# EAGLE board main (tugas nanang) (EAGLE 9.6.2)
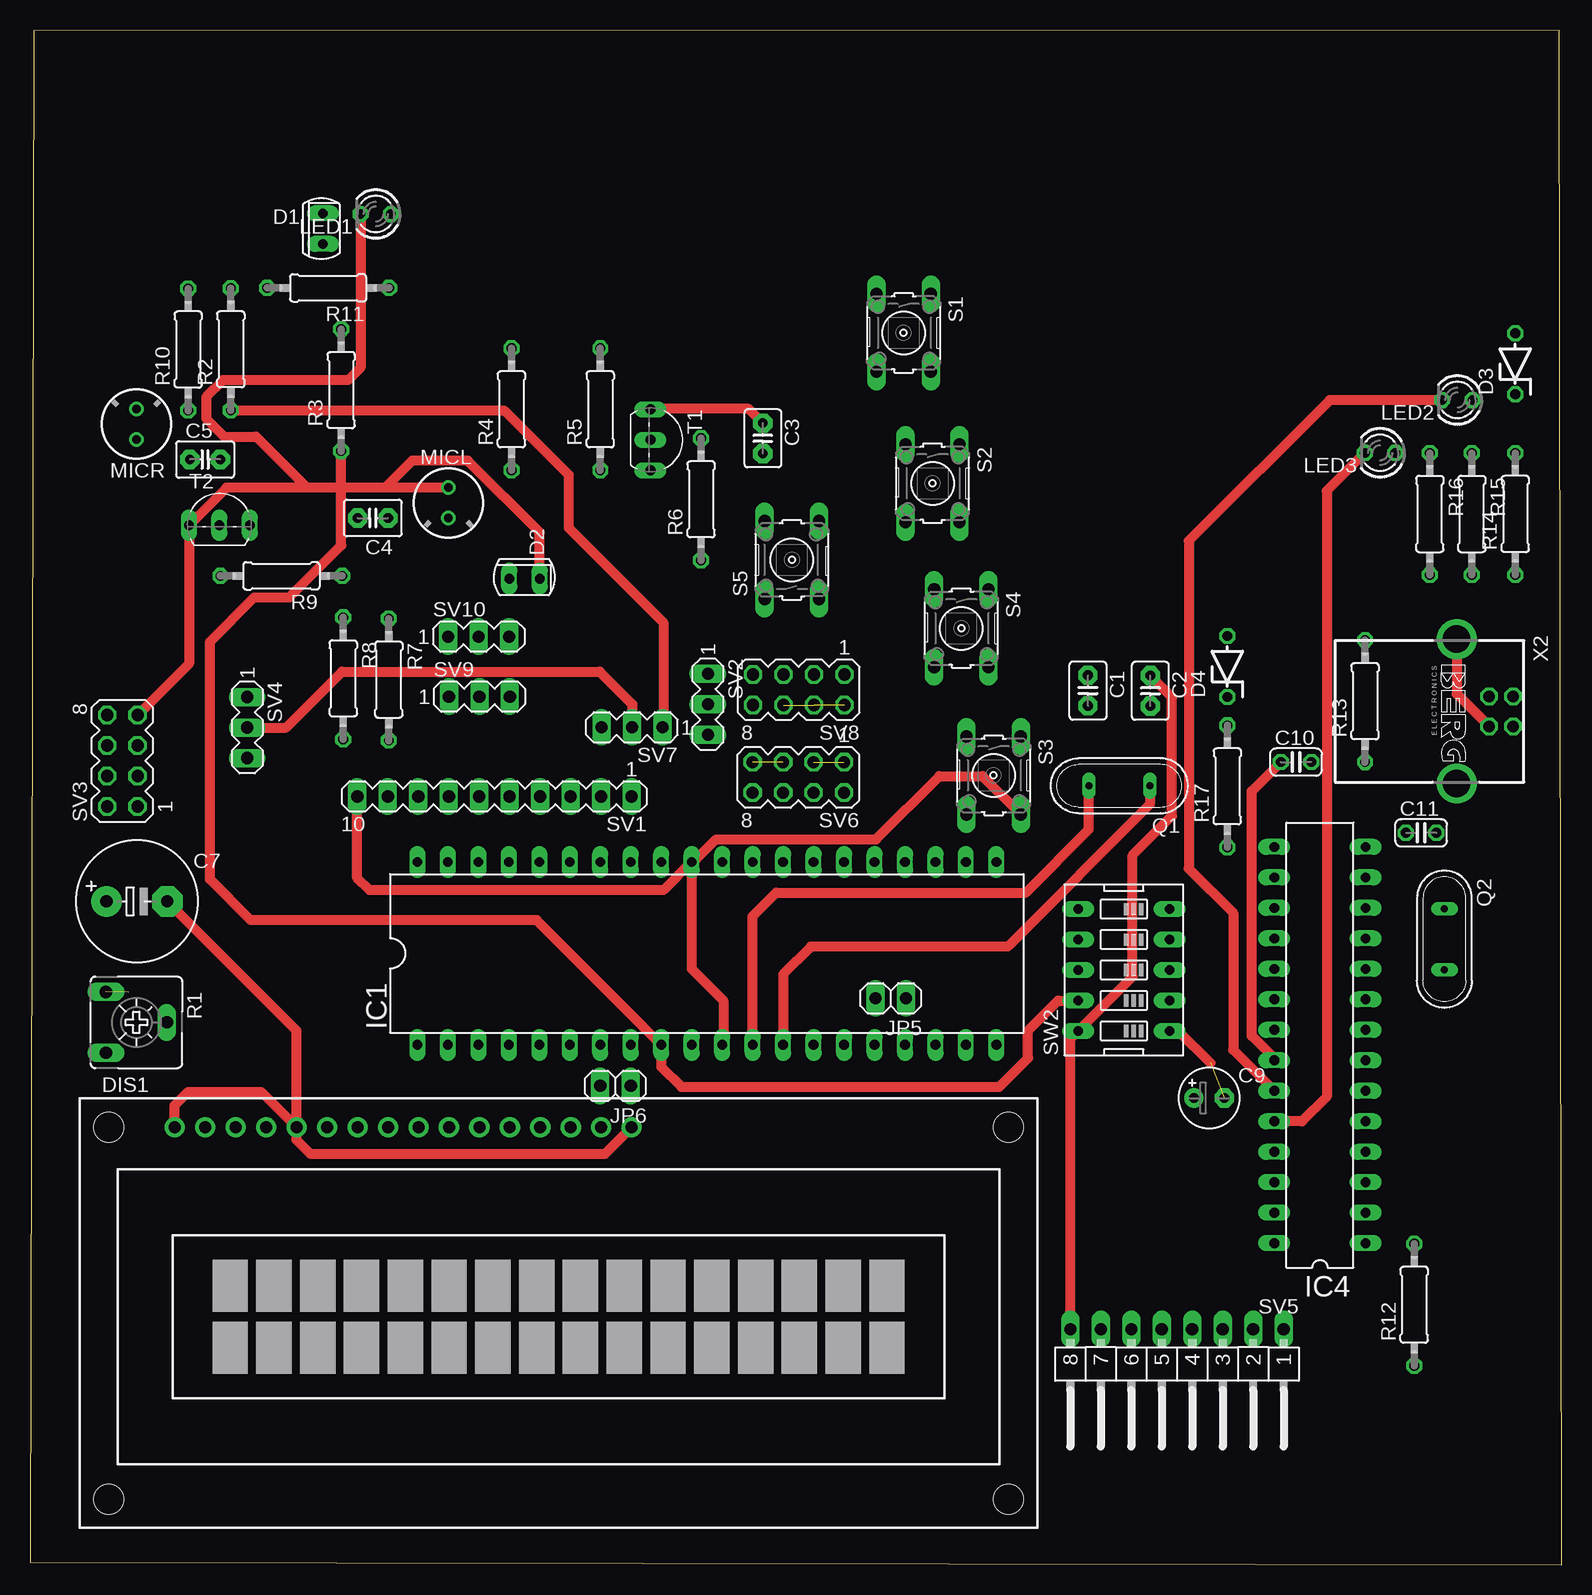
[diagram p0: board, top side]
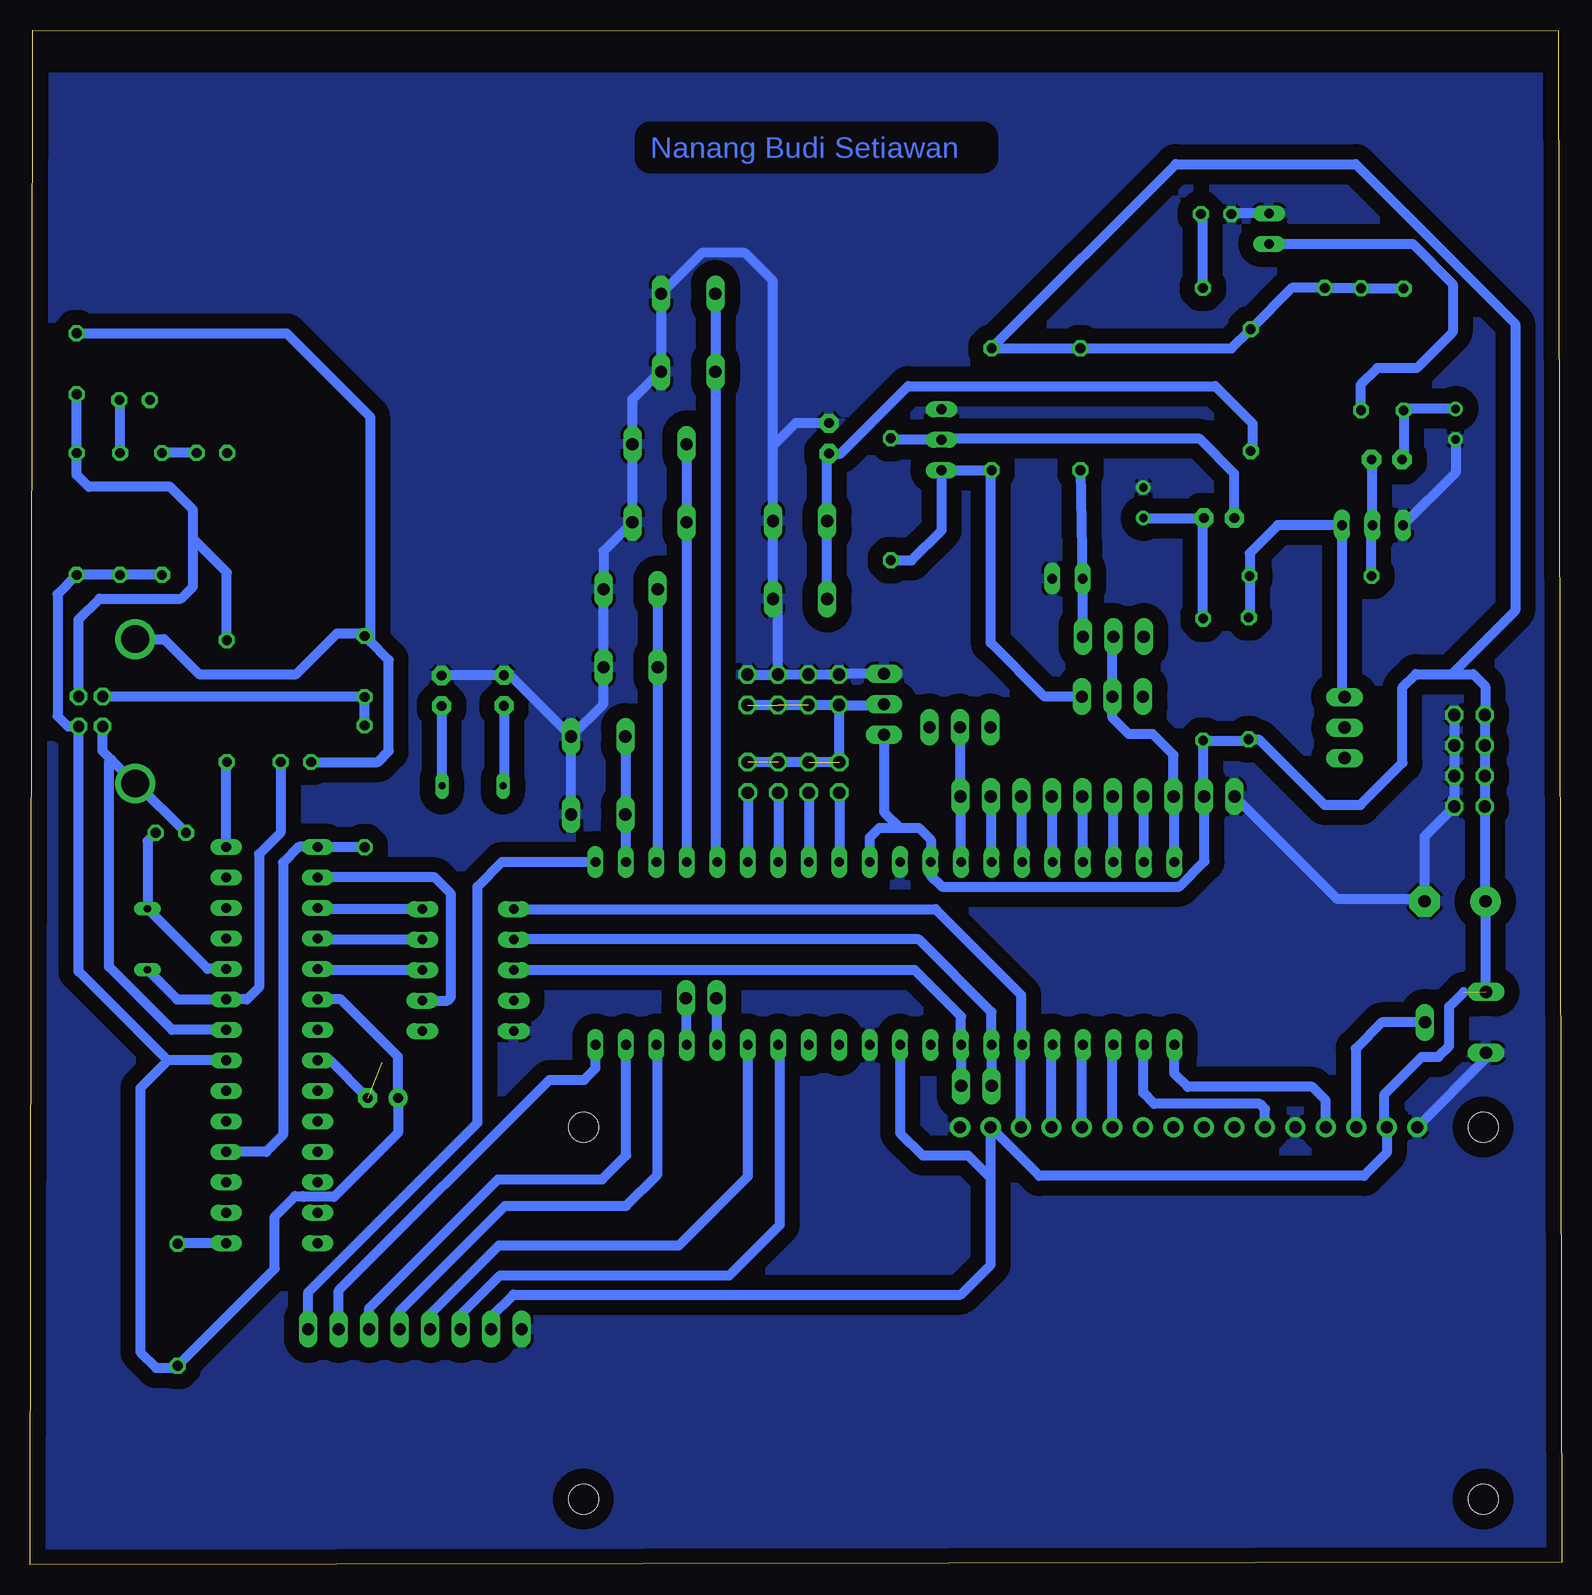
[diagram p1: board, bottom side, seen from below]

Size 127.7 x 127.88 mm. Coordinates in mm from the lower left corner, seen from the top.
Outline: 0,0.2 127.7,0 127.47,127.88 0.3,127.8 0,0.2
Copper layers (1*16): Top 0.035mm / dielectric 1.5mm / Bottom 0.035mm
Design rules "default": minimum track width 6mil, minimum drill 0.35mm, track to track 6mil, track to pad 6mil, pad to pad 6mil, via to via 6mil, smd to smd 6mil, copper to edge 40mil, drill to drill 6mil, minimum pad ring 10mil, minimum via ring 8mil, stop-mask expansion 4mil, vias tented up to drill 0mil, thermal gap 10mil

## Footprints (pad centres in the part's own frame; a part is rotated, then mirrored left to right if it is on the bottom)
C2.5-3 = drill 0.813 pad 1.6 octagon: 1 -1.27,0; 2 1.27,0
E5-10,5 = drill 1.016 pad 2.54: + -2.54,0 | drill 1.016 pad 2.54 octagon: - 2.54,0
E2,5-5 = drill 0.813 pad 1.6: + -1.27,0 | drill 0.813 pad 1.6 octagon: - 1.27,0
C025-024X044 = drill 0.813 octagon: 1 -1.27,0; 2 1.27,0
SFH225 = drill 0.813 long: A 0,1.27; K 0,-1.27
ZDIO-5 = drill 0.813 octagon: A 2.54,0; C -2.54,0
TUXGR_16X2_R2 = drill 1 pad 1.676: 1 -32,15.5; 2 -29.46,15.5; 3 -26.92,15.5; 4 -24.38,15.5; 5 -21.84,15.5; 6 -19.3,15.5; 7 -16.76,15.5; 8 -14.22,15.5; 9 -11.68,15.5; 10 -9.14,15.5; 11 -6.6,15.5; 12 -4.06,15.5; 13 -1.52,15.5; 14 1.02,15.5; 15 3.56,15.5; 16 6.1,15.5 | hole 2.5: -37.5,-15.5; 37.5,-15.5; -37.5,15.5; 37.5,15.5
DIL40 = drill 0.813 long: 1 -24.13,-7.62; 2 -21.59,-7.62; 3 -19.05,-7.62; 4 -16.51,-7.62; 5 -13.97,-7.62; 6 -11.43,-7.62; 7 -8.89,-7.62; 8 -6.35,-7.62; 9 -3.81,-7.62; 10 -1.27,-7.62; 11 1.27,-7.62; 12 3.81,-7.62; 13 6.35,-7.62; 14 8.89,-7.62; 15 11.43,-7.62; 16 13.97,-7.62; 17 16.51,-7.62; 18 19.05,-7.62; 19 21.59,-7.62; 20 24.13,-7.62; 21 24.13,7.62; 22 21.59,7.62; 23 19.05,7.62; 24 16.51,7.62; 25 13.97,7.62; 26 11.43,7.62; 27 8.89,7.62; 28 6.35,7.62; 29 3.81,7.62; 30 1.27,7.62; 31 -1.27,7.62; 32 -3.81,7.62; 33 -6.35,7.62; 34 -8.89,7.62; 35 -11.43,7.62; 36 -13.97,7.62; 37 -16.51,7.62; 38 -19.05,7.62; 39 -21.59,7.62; 40 -24.13,7.62
DIL28-3 = drill 0.813 long: 1 -16.51,-3.81; 2 -13.97,-3.81; 3 -11.43,-3.81; 4 -8.89,-3.81; 5 -6.35,-3.81; 6 -3.81,-3.81; 7 -1.27,-3.81; 8 1.27,-3.81; 9 3.81,-3.81; 10 6.35,-3.81; 11 8.89,-3.81; 12 11.43,-3.81; 13 13.97,-3.81; 14 16.51,-3.81; 15 16.51,3.81; 16 13.97,3.81; 17 11.43,3.81; 18 8.89,3.81; 19 6.35,3.81; 20 3.81,3.81; 21 1.27,3.81; 22 -1.27,3.81; 23 -3.81,3.81; 24 -6.35,3.81; 25 -8.89,3.81; 26 -11.43,3.81; 27 -13.97,3.81; 28 -16.51,3.81
1X02 = drill 1.016 long: 1 -1.27,0; 2 1.27,0
LED3MM = drill 0.813 octagon: A -1.27,0; K 1.27,0
F6050AP = drill 0.7 pad 1.2: 1 0,1.27; 2 0,-1.27
QS = drill 0.61 long: 1 -2.54,0; 2 2.54,0
CA6V = drill 1.016 long: A -2.54,-2.54; E 2.54,-2.54; S 0,2.54
0207/10 = drill 0.813 octagon: 1 -5.08,0; 2 5.08,0
B3F-10XX = drill 1.016 long: 1 -3.251,2.261; 2 3.251,2.261; 3 -3.251,-2.261; 4 3.251,-2.261
MA10-1 = drill 1.016 long: 1 -11.43,0; 2 -8.89,0; 3 -6.35,0; 4 -3.81,0; 5 -1.27,0; 6 1.27,0; 7 3.81,0; 8 6.35,0; 9 8.89,0; 10 11.43,0
MA03-1 = drill 1.016 long: 1 -2.54,0; 2 0,0; 3 2.54,0
MA04-2 = drill 1.016 octagon: 1 -3.81,-1.27; 2 -3.81,1.27; 3 -1.27,-1.27; 4 -1.27,1.27; 5 1.27,-1.27; 6 1.27,1.27; 7 3.81,-1.27; 8 3.81,1.27
MA08-1W = drill 1.016 long: 1 -8.89,0; 2 -6.35,0; 3 -3.81,0; 4 -1.27,0; 5 1.27,0; 6 3.81,0; 7 6.35,0; 8 8.89,0
EDG-05 = drill 0.813 long: 1 -5.08,-3.81; 2 -2.54,-3.81; 3 0,-3.81; 4 2.54,-3.81; 5 5.08,-3.81; 6 5.08,3.81; 7 2.54,3.81; 8 0,3.81; 9 -2.54,3.81; 10 -5.08,3.81
TO92-EBC = drill 0.813 long: B 0,-1.27; C 2.54,-1.27; E -2.54,-1.27
PN61729-S = drill 0.95 octagon: 1 1.25,4.71; 2 -1.25,4.71; 3 -1.25,2.71; 4 1.25,2.71 | drill 2.3 pad 2.9: S1 -6.02,0; S2 6.02,0

## Placement (x,y rotation side)
C1  22p  [C2.5-3]  88.19,72.83 270 top
C2  22p  [C2.5-3]  93.39,72.81 270 top
C3  10nF  [C2.5-3]  61.09,93.85 270 top
C4  100nF  [C2.5-3]  28.58,87.21 180 top
C5  100nF  [C2.5-3]  14.6,92.09 0 top
C7  1000uF/16V  [E5-10,5]  8.91,55.27 0 top
C9  10uF/16V  [E2,5-5]  98.29,38.88 0 top
C10  22pF  [C025-024X044]  105.54,66.88 0 top
C11  22pF  [C025-024X044]  115.96,60.98 0 top
D1  SFH225  [SFH225]  24.41,111.32 180 top
D2  SFH225  [SFH225]  41.22,82.16 90 top
D3  DZ3,6V  [ZDIO-5]  123.81,100.06 90 top
D4  DZ3,6V  [ZDIO-5]  99.81,74.84 90 top
DIS1  TUXGR_16X2_R2  [TUXGR_16X2_R2]  44.06,20.95 0 top
IC1  MEGA16-P  [DIL40]  56.43,50.93 0 top
IC4  MEGA8-P  [DIL28-3]  107.53,43.29 90 top
JP5  [1X02]  71.76,47.19 180 top
JP6  [1X02]  48.81,39.89 180 top
LED1  merah  [LED3MM]  28.82,112.54 180 top
LED2  Merah  [LED3MM]  118.98,97.04 180 top
LED3  hijau  [LED3MM]  112.54,92.64 180 top
MICL  MC  [F6050AP]  34.89,88.47 0 top
MICR  MC  [F6050AP]  8.86,95.03 180 top
Q1  8MHz  [QS]  90.81,64.9 180 top
Q2  12MHz  [QS]  117.9,52.11 270 top
R1  20K  [CA6V]  8.87,45.18 270 top
R2  56K  [0207/10]  16.74,101.27 90 top
R3  10K  [0207/10]  25.94,97.87 90 top
R4  56K  [0207/10]  40.14,96.27 90 top
R5  10K  [0207/10]  47.54,96.27 90 top
R6  100K  [0207/10]  55.94,88.77 90 top
R7  10K  [0207/10]  29.91,73.75 270 top
R8  10K  [0207/10]  26.11,73.85 270 top
R9  100K  [0207/10]  20.95,82.39 180 top
R10  10K  [0207/10]  13.19,101.25 90 top
R11  330  [0207/10]  24.85,106.39 180 top
R12  10K  [0207/10]  115.39,21.65 90 top
R13  68  [0207/10]  111.29,71.95 90 top
R14  2K2  [0207/10]  123.81,87.55 90 top
R15  330  [0207/10]  120.19,87.55 270 top
R16  330  [0207/10]  116.69,87.55 270 top
R17  68  [0207/10]  99.81,64.85 90 top
S1  [B3F-10XX]  72.83,102.64 270 top
S2  [B3F-10XX]  75.23,90.1 270 top
S3  [B3F-10XX]  80.33,65.76 270 top
S4  [B3F-10XX]  77.63,78.02 270 top
S5  [B3F-10XX]  63.51,83.72 90 top
SV1  [MA10-1]  38.72,64.01 180 top
SV2  [MA03-1]  56.51,71.69 270 top
SV3  [MA04-2]  7.7,66.98 90 top
SV4  [MA03-1]  18.11,69.75 270 top
SV5  [MA08-1W]  95.61,19.62 180 top
SV6  [MA04-2]  64.05,65.6 180 top
SV7  [MA03-1]  50.18,69.77 180 top
SV8  [MA04-2]  64.08,72.9 180 top
SV9  [MA03-1]  37.46,72.33 0 top
SV10  [MA03-1]  37.4,77.33 0 top
SW2  [EDG-05]  91.18,49.54 90 top
T1  [TO92-EBC]  52.99,93.73 270 top
T2  [TO92-EBC]  15.79,87.88 0 top
X2  PN61729-S  [PN61729-S]  118.93,71.1 270 top

## Library data of the parts
C1-C5 = capacitor-wima
C7 C9-C11 R2-R11 = rcl
D1 D2 = opto-trans-siemens; OC_FARNELL: unknown; OC_NEWARK: unknown
D3 D4 = diode
DIS1 = display-lcd; OC_FARNELL: unknown; OC_NEWARK: unknown
IC1 = atmel; MPN: ATMEGA16-16PU; OC_FARNELL: 9171142; OC_NEWARK: 01M6885
IC4 = atmel
JP5 JP6 = pinhead
LED1-LED3 = led
MICL MICR = microphon
Q1 Q2 SW2 = special
R1 = pot
R12-R17 = resistor
S1-S5 = switch-omron; MPN: B3F-1000; OC_FARNELL: 176432; OC_NEWARK: 36M3542
SV1-SV10 = con-lstb; OC_FARNELL: unknown; OC_NEWARK: unknown
T1 T2 = transistor
X2 = con-berg

## Nets
DGND: C9.- C10.1 C11.1 D3.A D4.A IC4.8 IC4.22 SW2.1 X2.4 X2.S1 X2.S2
GND: C1.1 C2.1 C3.1 C7.- D1.K D2.K DIS1.1 DIS1.5 DIS1.16 IC1.11 IC1.31 LED1.K MICL.1 MICR.1 R1.E S1.1 S1.2 S2.1 S2.2 S3.1 S3.2 S4.1 S4.2 S5.3 S5.4 SV1.10 SV2.1 SV3.1 SV3.3 SV3.5 SV3.7 SV5.8 SV8.1 SV8.3 SV8.5 SV8.7 SW2.10 T1.E T2.E
MISO: IC1.7 JP6.2 SW2.7
MOSI: DIS1.14 IC1.6 SW2.6
N$1: IC1.33 SV1.1 SV4.2 SV7.2
N$2: IC1.34 SV1.2
N$3: IC1.35 SV1.3
N$4: IC1.36 SV1.4
N$5: IC1.37 SV1.5
N$6: IC1.38 SV1.6
N$7: IC1.39 SV1.7
N$8: D2.A R4.1 SV10.3
N$9: IC1.24 S2.3 S2.4
N$10: DIS1.13 IC1.5
N$11: DIS1.12 IC1.4
N$12: DIS1.11 IC1.3
N$13: DIS1.6 IC1.2
N$14: R5.1 R6.1 SV9.3 T1.C
N$15: DIS1.3 R1.S
N$16: C1.2 IC1.12 Q1.2
N$17: C2.2 IC1.13 Q1.1
N$18: DIS1.4 IC1.1
N$19: D1.A R2.1 SV7.1
N$20: IC1.23 S4.3 S4.4
N$21: IC1.40 SV1.8 SV9.2 SV10.2
N$22: C4.2 R6.2 T1.B
N$23: C4.1 MICL.2 R7.1
N$24: R8.1 R9.1 SV4.1 T2.C
N$25: C5.2 R9.2 T2.B
N$26: C5.1 MICR.2 R10.1
N$27: IC1.22 S3.3 S3.4
N$28: IC1.25 S1.3 S1.4
N$30: IC1.21 SV5.1
N$32: IC1.20 SV5.2
N$33: IC1.19 SV5.3
N$34: IC1.18 SV5.4
N$35: IC1.15 SV5.5
N$36: IC1.14 SV5.6
N$37: IC1.16 JP5.2
N$38: IC1.17 JP5.1
N$41: LED1.A R11.1
N$42: IC4.1 R12.2
N$44: IC1.26 SV6.2
N$45: IC1.27 SV6.4
N$46: IC1.28 SV6.6
N$47: IC1.29 SV6.8
N$51: C10.2 IC4.9 Q2.2
N$52: C11.2 IC4.10 Q2.1
N$53: IC4.14 R13.1
N$55: LED2.A R15.1
N$56: LED3.A R16.1
N$57: IC4.23 LED2.K
N$58: IC4.24 LED3.K
N$59: D4.C R17.2 X2.3
N$67: IC4.4 IC4.15 R17.1
N$69: D3.C R13.2 R14.2 X2.2
N$175: IC4.17 SW2.5
N$176: IC4.18 SW2.4
N$177: IC4.19 SW2.3
N$178: IC4.16 SW2.2
RESET: C3.2 IC1.9 R3.1 S5.1 S5.2 SW2.9
SCK: IC1.8 JP6.1 SW2.8
VCC: C7.+ DIS1.2 DIS1.15 IC1.10 IC1.30 IC1.32 R1.A R2.2 R3.2 R4.2 R5.2 R7.2 R8.2 R10.2 R11.2 SV1.9 SV2.3 SV3.2 SV3.4 SV3.6 SV3.8 SV5.7
VDD: SV2.2 SV6.1 SV6.3 SV6.5 SV6.7 SV8.2 SV8.4 SV8.6 SV8.8
VPP: C9.+ IC4.7 IC4.20 R12.1 R14.1 R15.2 R16.2 X2.1

## Tracks (layer width: path | path; a pad name or v marks a point on that pad's centre or on a via)
DGND  (1 unrouted)
  Top 0.813: IC4.22 103.72,42.17 101.84,44.05 101.84,64.45 C10.1 | SW2.1 95.74,44.46 98.4,41.8 | X2.S1 118.93,72.56 X2.4
  Bottom 0.813: 120.92,67.08 X2.S2 118.79,65.08 C11.1 | 120.92,67.08 121.64,67.79 X2.4 | X2.S1 116.52,77.12 113.6,74.2 105.5,74.2 102.1,77.6 100.03,77.6 D4.A 99.36,76.94 | C10.1 98.72,66.88 97.8,67.8 97.8,75.37 99.36,76.94 | IC4.8 115.86,44.56 121.1,49.8 121.1,66.9 120.92,67.08 | C9.- 102.7,42.02 IC4.22 | D3.A 106.3,102.6 99.36,95.67 99.36,76.94
GND
  Top 0.813: SV3.7 13.25,75.07 T2.E 16.38,89.74 23.1,89.74 | MICL.1 29.6,89.74 | 29.6,89.74 23.1,89.74 | D2.K 42.49,86.01 36.5,92 31.86,92 29.6,89.74 | LED1.K 27.55,99.75 26.5,98.7 16.1,98.7 14.7,97.3 14.7,95.5 16.2,94 18.84,94 23.1,89.74 | IC1.31 55.16,49.64 57.8,47 57.8,43.41 IC1.11 | SV5.8 86.72,43.81 SW2.10 91.9,48.99 91.9,59.1 95.2,62.4 95.2,72.27 C2.1 | C3.1 59.91,96.3 51.75,96.3 T1.E | IC1.31 52.81,56.2 28.3,56.2 27.29,57.21 SV1.10 | IC1.31 55.31,58.55 57.2,60.43 70.53,60.43 75.8,65.7 79.4,65.7 S3.2 | DIS1.5 22.22,44.5 C7.- | DIS1.1 12.06,38.26 13.2,39.4 19.27,39.4 DIS1.5 | DIS1.16 47.91,34.2 23.4,34.2 22.22,35.38 DIS1.5
  Bottom 0.813: SV8.3 SV8.5 SV8.7 60.21,74.23 SV2.1 | SV8.1 SV8.3 | S5.4 S5.3 65.35,80.05 SV8.3 | C3.1 63.88,95.12 65.8,93.2 65.8,87 S5.4 | 75.1,99.5 S1.1 71.68,109.3 68.1,109.3 65.77,106.97 S5.4 | 75.1,99.5 75.1,98.8 75.09,98.81 S1.2 | S3.1 79.89,71.71 S4.2 S4.1 79.89,84.45 S2.2 S2.1 77.49,97.11 75.1,99.5 | MICR.1 8.86,91 T2.E | C7.- 11.45,55.5 | 11.45,55.5 11.45,60.69 SV3.1 9.1,63.3 9.1,63.8 8.97,63.93 SV3.3 SV3.5 SV3.7 | SV1.10 18.78,55.5 11.45,55.5 | C2.1 93.37,74.1 C1.1 87.68,74.1 S3.1 | D1.K 27.5,112.59 LED1.K | S3.2 S3.1 | R1.E 6.33,42.18 DIS1.1
  pour Bottom (isolate 1.27): 0.3,123.9 126.3,123.9 126.3,-0.1 0.3,-0.1 0.3,121.9
MISO
  Bottom 0.813: SW2.7 87.35,52.1 53.6,52.1 47.54,46.04 IC1.7 JP6.2 | JP6.2 47.54,39.44 47.5,39.4 47.5,39.85 JP6.2
MOSI
  Bottom 0.813: DIS1.14 45.08,42.8 45.08,43.23 | 45.08,43.23 IC1.6 | SW2.6 52.22,54.62 45.08,47.48 45.08,43.23
N$1
  Top 0.813: SV4.2 21.35,69.75 26.01,74.41 47.49,74.41 50.2,71.7 50.2,69.79 SV7.2
  Bottom 0.813: IC1.33 50.08,63.94 SV1.1 50.15,69.74 SV7.2
N$2
  Bottom 0.813: IC1.34 47.54,63.94 SV1.2
N$3
  Bottom 0.813: IC1.35 45,63.94 SV1.3
N$4
  Bottom 0.813: IC1.36 42.46,63.94 SV1.4
N$5
  Bottom 0.813: IC1.37 39.92,63.94 SV1.5
N$6
  Bottom 0.813: IC1.38 37.38,63.94 SV1.6
N$7
  Bottom 0.813: IC1.39 34.84,63.94 SV1.7
N$8
  Bottom 0.813: SV10.3 D2.A 39.99,82.2 R4.1
N$9
  Bottom 0.813: S2.3 S2.4 72.97,58.58 IC1.24
N$10
  Bottom 0.813: DIS1.13 42.54,43.23 IC1.5
N$11
  Bottom 0.813: DIS1.12 40,43.23 IC1.4
N$12
  Bottom 0.813: DIS1.11 37.46,43.23 IC1.3
N$13
  Bottom 0.813: DIS1.6 24.76,37.96 25.2,38.4 34,38.4 34.9,39.3 34.9,43.25 IC1.2
N$14
  Bottom 0.813: SV9.3 43.13,72.33 47.6,76.8 47.6,91.13 | 47.6,91.13 R5.1 | 47.6,91.13 47.66,91.19 T1.C 51.7,91.17 51.7,86.2 54.21,83.69 R6.1
N$15
  Bottom 0.813: R1.S 15.02,45.18 17.2,43 17.2,36.51 DIS1.3
N$16
  Top 0.813: Q1.2 88.27,61.27 83,56 62.2,56 60.24,54.04 IC1.12
  Bottom 0.813: C1.2 88.19,64.98 Q1.2
N$17
  Top 0.813: Q1.1 93.35,63.35 81.5,51.5 65.1,51.5 62.78,49.18 IC1.13
  Bottom 0.813: Q1.1 93.35,71.5 C2.2
N$18
  Bottom 0.813: DIS1.4 19.68,38.68 20.8,39.8 31.2,39.8 32.3,40.9 IC1.1
N$19
  Top 0.813: R2.1 39.51,96.19 44.9,90.8 44.9,86.4 52.8,78.5 52.8,69.85 SV7.1
  Bottom 0.813: D1.A 12.45,110.05 9.1,106.7 9.1,102.7 12.1,99.7 15.4,99.7 16.8,98.3 16.8,96.25 R2.1
N$20
  Bottom 0.813: S4.3 S4.4 75.37,58.66 IC1.23
N$21
  Bottom 0.813: IC1.40 32.3,63.94 SV1.8 32.37,67.47 34.1,69.2 36.1,69.2 37.46,70.56 SV9.2 37.46,77.27 SV10.2
N$22
  Bottom 0.813: R6.2 55.82,93.73 T1.B 51.65,93.8 30.2,93.8 27.31,90.91 C4.2
N$23
  Bottom 0.813: R7.1 29.91,87.15 | 29.91,87.15 C4.1 | MICL.2 29.96,87.2 29.91,87.15
N$24
  Bottom 0.813: R8.1 26.03,79.01 R9.1 26.03,84.27 23.69,86.61 T2.C 18.33,72.51 SV4.1
N$25
  Bottom 0.813: R9.2 15.87,86.53 T2.B 15.79,92.01 C5.2
N$26
  Bottom 0.813: C5.1 13.19,92.23 R10.1 13.06,96.3 MICR.2
N$27
  Bottom 0.813: IC1.22 78.02,62.46 S3.4 S3.3
N$28
  Bottom 0.813: S1.3 S1.4 70.57,58.72 IC1.25
N$30
  Bottom 0.813: SV5.1 104.5,22.7 90.4,36.8 90.4,56.5 88.35,58.55 IC1.21
N$32
  Bottom 0.813: SV5.2 101.96,22.84 84.4,40.4 81.5,40.4 80.56,41.34 IC1.20
N$33
  Bottom 0.813: SV5.3 99.42,21.38 88.7,32.1 80,32.1 78,34.1 78,43.29 IC1.19
N$34
  Bottom 0.813: SV5.4 96.88,21.12 88.1,29.9 78,29.9 75.4,32.5 75.4,43.23 IC1.18
N$35
  Bottom 0.813: SV5.5 94.34,20.86 88.6,26.6 73.6,26.6 67.86,32.34 IC1.15
N$36
  Bottom 0.813: SV5.6 91.8,20.8 88.5,24.1 69.4,24.1 65.2,28.3 65.2,43.19 IC1.14
N$37
  Bottom 0.813: JP5.2 70.49,43.4 IC1.16
N$38
  Bottom 0.813: JP5.1 73.03,43.4 IC1.17
N$41
  Bottom 0.813: R11.1 29.93,112.38 LED1.A
N$42
  Bottom 0.813: IC4.1 115.34,26.78 R12.2
N$44
  Bottom 0.813: SV6.2 IC1.26
N$45
  Bottom 0.813: SV6.4 IC1.27
N$46
  Bottom 0.813: SV6.6 IC1.28
N$47
  Bottom 0.813: SV6.8 IC1.29
N$51
  Bottom 0.813: Q2.2 115.43,47.1 IC4.9 109.6,47.1 108.6,48.1 108.6,59.2 106.81,60.99 C10.2
N$52
  Bottom 0.813: IC4.10 112.89,49.64 Q2.1 117.9,60.31 C11.2
N$53
  Bottom 0.813: IC4.14 111.34,66.82 R13.1
N$55
  Bottom 0.813: R15.1 120.19,96.98 LED2.A
N$56
  Bottom 0.813: LED3.A R16.1
N$57
  Top 0.813: LED2.K 108.34,97.04 96.6,85.3 96.6,58 100.3,54.3 100.3,42.9 IC4.23
N$58
  Top 0.813: LED3.K 108.1,89.47 108.1,39 106.04,36.94 IC4.24
N$59
  Bottom 0.813: X2.3 99.86,72.35 D4.C R17.2
N$67
  Bottom 0.813: IC4.4 108,34.4 106.6,35.8 106.6,58.5 105.3,59.8 IC4.15 103.69,59.77 R17.1
N$69
  Bottom 0.813: D3.C R14.2 123.81,90.81 122.8,89.8 116,89.8 114.1,87.9 114.1,85.5 | X2.2 123.64,78.76 121.9,80.5 115.1,80.5 114.1,81.5 114.1,85.5 | R13.2 111.29,82.69 114.1,85.5
N$175
  Bottom 0.813: SW2.5 103.62,54.62 IC4.17
N$176
  Bottom 0.813: SW2.4 103.62,52.08 IC4.18
N$177
  Bottom 0.813: SW2.3 103.62,49.54 IC4.19
N$178
  Bottom 0.813: SW2.2 92.9,47 92.6,47.3 92.6,55.9 93.96,57.26 IC4.16
RESET
  Top 0.813: R3.1 25.94,84.94 21.6,80.6 18.7,80.6 15,76.9 15,57.1 18.4,53.7 42.23,53.7 IC1.9 52.62,41.48 54.3,39.8 80.8,39.8 83.2,42.2 83.2,44.5 85.7,47 SW2.9
  Bottom 0.813: S5.1 S5.2 61.25,92.42 C3.2 60.12,92.58 54.5,98.2 28.9,98.2 25.8,95.1 25.8,92.93 R3.1
SCK
  Bottom 0.813: SW2.8 53.94,49.54 50.08,45.68 IC1.8 JP6.1
VCC  (1 unrouted)
  Bottom 0.813: SV5.7 89.26,20.64 87.4,22.5 50.1,22.5 47.6,25 47.6,32.2 | 47.6,32.2 47.6,36.43 | 47.6,36.43 DIS1.15 | 8.2,47.7 9.4,46.5 9.4,43.2 10.3,42.3 11.7,42.3 14.8,39.2 14.8,36.65 DIS1.2 14.6,34.3 16.5,32.4 43.57,32.4 47.6,36.43 | IC1.30 57.7,60.6 56.9,61.4 55.2,61.4 | 55.2,61.4 53.6,61.4 52.6,60.4 52.6,58.57 IC1.32 52.62,57.42 51.7,56.5 31.9,56.5 29.8,58.6 29.8,63.98 SV1.9 29.91,64.09 R7.2 26.21,68.67 R8.2 25.27,68.77 19.8,63.3 16.8,63.3 13.3,66.8 13.3,73.1 12.2,74.2 9.2,74.2 | R10.2 16.72,106.33 R2.2 19.73,106.35 R11.2 22.5,106.39 R3.2 27.54,101.35 R4.2 R5.2 32.19,116.7 17.2,116.7 3.9,103.4 3.9,79.5 9.2,74.2 | IC1.10 55.16,35.96 53.3,34.1 49.5,34.1 47.6,32.2 | SV2.3 56.51,62.71 55.2,61.4 | R1.A 6.33,55.23 C7.+ 6.43,55.33 SV3.2 SV3.4 SV3.6 SV3.8 6.4,70.82 6.4,73.2 7.4,74.2 9.2,74.2
VDD  (4 unrouted)
  Bottom 0.813: SV6.1 SV6.7 60.24,71.6 SV8.8 | SV8.8 SV8.2 | SV8.8 56.57,71.63 SV2.2
VPP
  Bottom 0.813: R16.2 R15.2 R14.1 125.4,80.88 125.4,70.7 124.55,69.85 X2.1 123.64,49.44 116.22,42.02 IC4.7 116.18,42.02 118.5,39.7 118.5,17.7 117.2,16.4 115.56,16.4 R12.1 107.3,24.66 107.3,29 105.6,30.7 104.94,30.7 104.88,30.64 102.36,30.64 97.02,35.98 C9.+ 97.02,42.32 101.8,47.1 IC4.20

## Text on the board
Bottom: Nanang Budi Setiawan